# Altium PCB SD-WC.PcbDoc
Units mil, origin at the board's own origin, x right, y up, seen from the top; angles counter-clockwise.
Board outline 3070.87 x 2047.24 mil, 2 copper layers (Top Layer, Top, Bottom Layer, Bottom); 51 components, 45 nets, 219 pads, 28 vias.
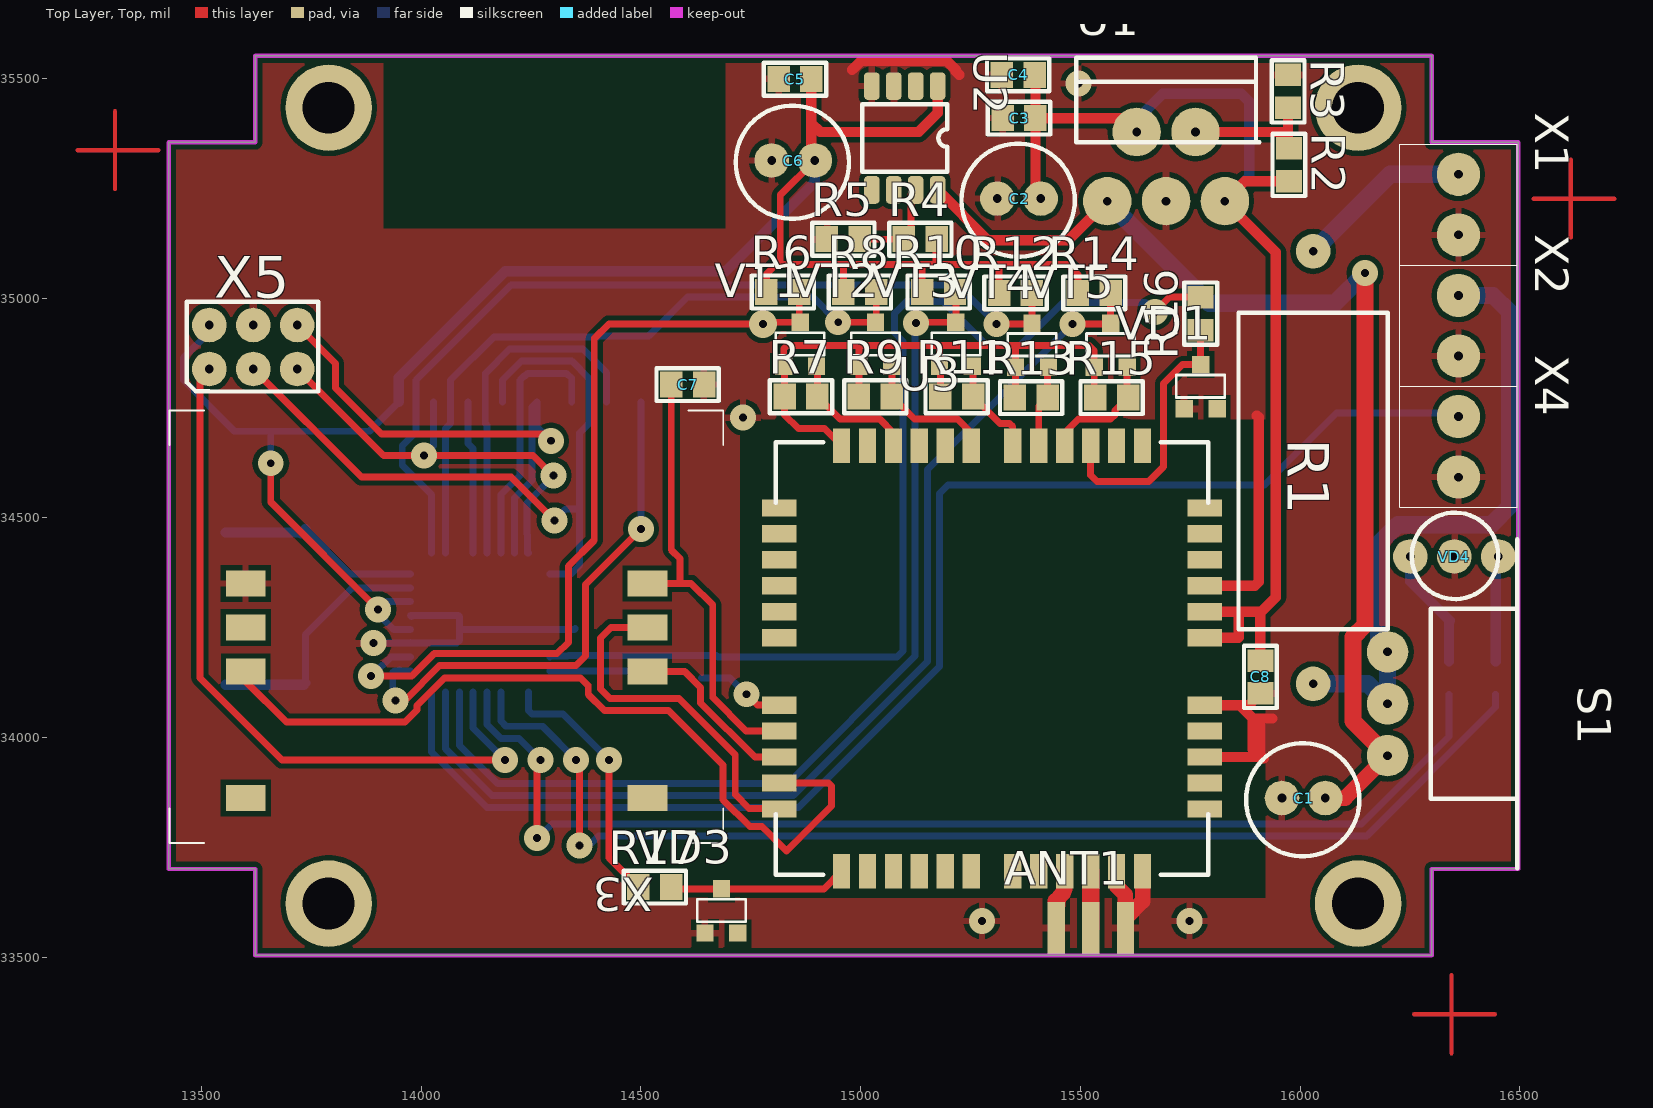
[diagram p0: Top Layer, Top view]
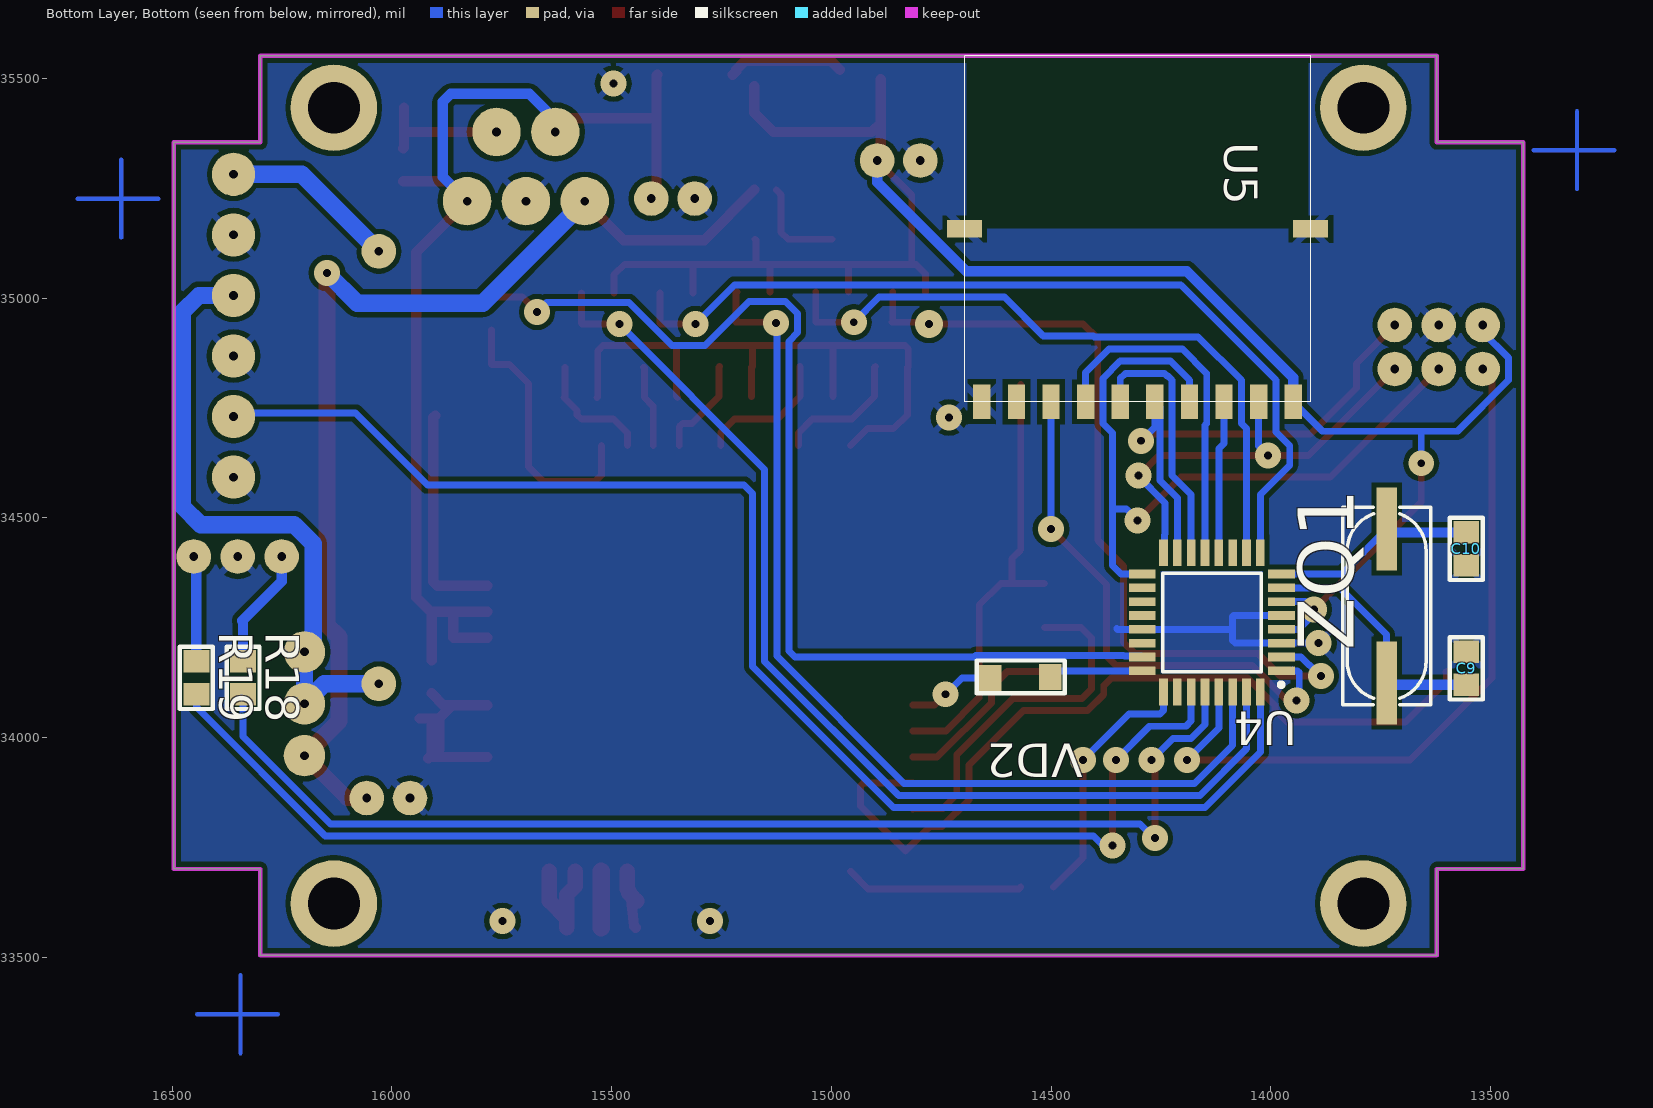
[diagram p1: Bottom Layer, Bottom view, seen from below]

## Layer stack, top to bottom
Top Layer, Top: signal copper 1.4
Dielectric: dielectric 12.6, FR-4, Dk 4.8
Bottom Layer, Bottom: signal copper 1.4

## Board outline
13622.05,33503.94 16299.21,33503.94 16299.21,33700.79 16496.06,33700.79 16496.06,35354.33 16299.21,35354.33 16299.21,35551.18 13622.05,35551.18 13622.05,35354.33 13425.2,35354.33 13425.2,33700.79 13622.05,33700.79

## Design rules (kind name [scope] priority, off if disabled: settings)
Clearance "Clearance_Top Layer, Top_PadToPad" [ExistsOnLayer('Top Layer, Top') And IsPad vs ExistsOnLayer('Top Layer, Top') And IsPad] p1: gap=11.81
Clearance "Clearance_Top Layer, Top_PadToLine" [ExistsOnLayer('Top Layer, Top') And IsPad vs ExistsOnLayer('Top Layer, Top') And IsWire] p2: gap=11.81
Clearance "Clearance_Top Layer, Top_LineToLine" [ExistsOnLayer('Top Layer, Top') And IsWire vs ExistsOnLayer('Top Layer, Top') And IsWire] p3: gap=11.81
Clearance "Clearance_Top Layer, Top_ViaToPad" [ExistsOnLayer('Top Layer, Top') And IsVia vs ExistsOnLayer('Top Layer, Top') And IsPad] p4: gap=11.81
Clearance "Clearance_Top Layer, Top_ViaToLine" [ExistsOnLayer('Top Layer, Top') And IsVia vs ExistsOnLayer('Top Layer, Top') And IsWire] p5: gap=11.81
Clearance "Clearance_Top Layer, Top_ViaToVia" [ExistsOnLayer('Top Layer, Top') And IsVia vs ExistsOnLayer('Top Layer, Top') And IsVia] p6: gap=11.81
Clearance "Clearance_Bottom Layer, Bottom_PadToPad" [ExistsOnLayer('Bottom Layer, Bottom') And IsPad vs ExistsOnLayer('Bottom Layer, Bottom') And IsPad] p7: gap=11.81
Clearance "Clearance_Bottom Layer, Bottom_PadToLine" [ExistsOnLayer('Bottom Layer, Bottom') And IsPad vs ExistsOnLayer('Bottom Layer, Bottom') And IsWire] p8: gap=11.81
Clearance "Clearance_Bottom Layer, Bottom_LineToLine" [ExistsOnLayer('Bottom Layer, Bottom') And IsWire vs ExistsOnLayer('Bottom Layer, Bottom') And IsWire] p9: gap=11.81
Clearance "Clearance_Bottom Layer, Bottom_ViaToPad" [ExistsOnLayer('Bottom Layer, Bottom') And IsVia vs ExistsOnLayer('Bottom Layer, Bottom') And IsPad] p10: gap=11.81
Clearance "Clearance_Bottom Layer, Bottom_ViaToLine" [ExistsOnLayer('Bottom Layer, Bottom') And IsVia vs ExistsOnLayer('Bottom Layer, Bottom') And IsWire] p11: gap=11.81
Clearance "Clearance_Bottom Layer, Bottom_ViaToVia" [ExistsOnLayer('Bottom Layer, Bottom') And IsVia vs ExistsOnLayer('Bottom Layer, Bottom') And IsVia] p12: gap=11.81
Clearance Clearance_Design_HoleToHole [(IsVia Or IsThruPin) vs (IsVia Or IsThruPin)] p13: gap=13
Clearance [All] p14: gap=11.81
PlaneClearance [All] p1: clearance=10
PolygonConnect PolygonConnect_4 [IsPolygon And InNet('GND') And OnLayer('Bottom Layer, Bottom') vs IsVia] p1: connectstyle=Relief reliefconductorwidth=15 reliefentries=4 polygonreliefangle="45 Angle"
PolygonConnect PolygonConnect_3 [IsPolygon And InNet('GND') And OnLayer('Bottom Layer, Bottom') vs IsPad] p2: connectstyle=Relief reliefconductorwidth=15 reliefentries=4 polygonreliefangle="45 Angle"
PolygonConnect PolygonConnect_2 [IsPolygon And InNet('GND') And OnLayer('Top Layer, Top') vs IsVia] p3: connectstyle=Relief reliefconductorwidth=15 reliefentries=4 polygonreliefangle="90 Angle"
PolygonConnect PolygonConnect_1 [IsPolygon And InNet('GND') And OnLayer('Top Layer, Top') vs IsPad] p4: connectstyle=Relief reliefconductorwidth=15 reliefentries=4 polygonreliefangle="90 Angle"
PolygonConnect [All] p5: connectstyle=Relief reliefconductorwidth=10 reliefentries=4 polygonreliefangle="90 Angle"
RoutingVias [All] p1: holewidth=28 width=50 viastyle="Through Hole" minholewidth=28 minwidth=50 maxholewidth=28 maxwidth=50
SilkscreenOverComponentPads [All] p1: minsilkscreentomaskgap=10
SolderMaskExpansion [All] p1: expansion=4
Width [All] p1: maxlimit=10 minlimit=10 preferedwidth=10
26 further rules are at their usual default settings.

## Components (designator, comment, footprint, x,y, rotation, side; value= is the part's Value field where it differs from the comment)
ANT1 "" ANT-CAB 15523.62,33566.93 r0 top
C1 "100 uF" KONDENS-E6.5_KONDENS-E6.5MM(Primary) 15958.66,33862.2 r0 top
C2 "100 uF" KONDENS-E6.5_KONDENS-E6.5MM(Primary) 15311.02,35226.38 r0 top
C3 "22 pF" C0805 15360.24,35409.45 r180 top
C4 "56pF" C0805 15358.27,35507.87 r180 top
C5 "0.1uF" C0805 14850.39,35498.03 r180 top
C6 "100uF" KONDENS-E6.5_KONDENS-E6.5MM(Primary) 14797.24,35312.99 r0 top
C7 "0.1uF" C0805 14606.3,34803.15 r0 top
C8 "0.1uF" C0805 15909.45,34137.8 r270 top
C9 "22 pF" C0805 13555.12,34157.48 r270 bottom
C10 "22 pF" C0805 13555.12,34429.13 r90 bottom
R1 "15R" R2W 16029.53,35106.3 r270 top
R2 "500R" RR0805 15974.41,35303.15 r270 top
R3 "1K" RR0805 15972.44,35470.47 r270 top
R4 "170K" RR0805 15135.83,35133.86 r0 top
R5 "100K" RR0805 14960.63,35133.86 r0 top
R6 "10K" RR0805 14822.83,35013.78 r0 top
R7 "10K" RR0805 14864.17,34775.59 r0 top
R8 "10K" RR0805 14998.03,35013.78 r0 top
R9 "10K" RR0805 15033.46,34775.59 r0 top
R10 "10K" RR0805 15177.17,35013.78 r0 top
R11 "10K" RR0805 15218.5,34775.59 r0 top
R12 "10K" RR0805 15352.36,35011.81 r0 top
R13 "10K" RR0805 15387.8,34773.62 r0 top
R14 "10K" RR0805 15531.5,35011.81 r0 top
R15 "10K" RR0805 15570.87,34773.62 r0 top
R16 "200R" RR0805 15773.62,34964.57 r90 top
R17 "200R" RR0805 14531.5,33659.45 r0 top
R18 "200R" RR0805 16338.58,34135.83 r270 bottom
R19 "200R" RR0805 16444.88,34135.83 r270 bottom
S1 "" "PD 9-1" 16198.82,34076.77 r270 top
U1 "" L200CV 15561.02,35220.47 r0 top
U2 "" SOIC-8 15175.2,35482.28 r270 top
U3 "" WISMO 14812.99,34521.65 r0 top
U4 "" 32A_ATMEGA8L-8AI(Primary) 14133.86,34261.81 r0 bottom
U5 "" TR24A 13948.82,34763.78 r270 bottom
VD1 "" SOT23 15736.22,34748.03 r0 top
VD2 "" "MINI MELF" 14570.87,34135.83 r0 bottom
VD3 "" SOT23 14645.67,33555.12 r0 top
VD4 "" LIGHTDIODE2 16352.36,34413.39 r0 top
VT1 "" SOT23 14824.8,34844.49 r0 top
VT2 "" SOT23 14996.06,34844.49 r0 top
VT3 "" SOT23 15179.13,34844.49 r0 top
VT4 "" SOT23 15352.36,34842.52 r0 top
VT5 "" SOT23 15531.5,34842.52 r0 top
X1 "" DG350-3.5-2P 16360.24,35281.5 r270 top
X2 "" DG350-3.5-2P 16360.24,35005.91 r270 top
X3 "" MOLEX91228-0001 14529.53,34350.39 r180 top
X4 "" DG350-3.5-2P 16360.24,34730.32 r270 top
X5 "" WW3-2 13517.72,34838.58 r0 top
ZQ1 "3.6864 MHz" HC-49/S-SMD_邢-99_(SMD)(Primary) 13736.22,34124.02 r90 bottom

## Footprints (in the part's own frame and the unit in brackets; to place one, negate y for a bottom-side part, rotate by r counter-clockwise, add the part's x,y. Pads: shape width x height; smd on the part's side, far side on the other; paste and mask are expansions set on the pad)
32A_ATMEGA8L-8AI(Primary) [mm]
  rect 1.55x0.5 smd: 1(-4.025,2.8) 2(-4.025,2) 3(-4.025,1.2) 4(-4.025,0.4) 5(-4.025,-0.4) 6(-4.025,-1.2) 7(-4.025,-2) 8(-4.025,-2.8) 17(4.025,-2.8) 18(4.025,-2) 19(4.025,-1.2) 20(4.025,-0.4) 21(4.025,0.4) 22(4.025,1.2) 23(4.025,2) 24(4.025,2.8)
  rect 0.5x1.55 smd: 9(-2.8,-4.025) 10(-2,-4.025) 11(-1.2,-4.025) 12(-0.4,-4.025) 13(0.4,-4.025) 14(1.2,-4.025) 15(2,-4.025) 16(2.8,-4.025) 25(2.8,4.025) 26(2,4.025) 27(1.2,4.025) 28(0.4,4.025) 29(-0.4,4.025) 30(-1.2,4.025) 31(-2,4.025) 32(-2.8,4.025)
  silkscreen extent -4.12,-2.85 2.85,3.72
ANT-CAB [mm]
  rect 1x3 smd: 1(0,0) 2(-2,0) 3(2,0)
C0805 [mm]
  rect 1.3x1.5 smd: 1(-0.95,0) 2(0.95,0)
  silkscreen extent -1.8,-0.95 1.8,0.95
DG350-3.5-2P [mm]
  round 2.5 hole 0.5: 1(0,0) 2(3.5,0)
  silkscreen extent -1.75,-3.4 5.25,3.4
HC-49/S-SMD_邢-99_(SMD)(Primary) [mm]
  rect 4.8x1.2 smd: A(0,0) B(8.89,0)
  silkscreen extent -1.27,-2.54 10.16,2.54
KONDENS-E6.5_KONDENS-E6.5MM(Primary) [mm]
  round 2 hole 0.5: 1(2.5,0) 2(0,0)
  silkscreen extent -2.08,-3.37 4.48,3.17
L200CV [mm]
  round 2.8 hole 0.5: 1(0,0) 2(1.7,4) 3(3.4,0) 4(5.1,4) 5(6.8,0)
  silkscreen extent -1.8,3.4 8.8,8.3
LIGHTDIODE2 [mm]
  round 2 hole 0.5: 1(-0.04,-0.04) 2(-2.58,-0.04) 3(2.5,-0.04)
  silkscreen extent -2.5,-2.5 2.5,2.5
"MINI MELF" [mm]
  rect 1.3x1.5 smd: 1(-1.75,-0.04) 2(1.7,0)
  silkscreen extent -2.6,-1 2.5,0.91
MOLEX91228-0001 [mm]
  rect 2.3x1.5 smd: 1(0.38,0) 2(0.38,2.54) 3(0.38,5.08) 4(23.6,0) 5(23.6,2.54) 6(23.6,5.08) 7(23.6,12.4) 8(0.38,12.4)
  silkscreen extent -4,-10 28,15
"PD 9-1" [mm]
  round 2.4 hole 0.5: 1(0,0) 2(-3,0) 3(3,0)
  silkscreen extent -9.5,2.5 9.5,7.5
R2W [mm]
  round 2 hole 0.5: 1(0,0) 2(25,0)
  silkscreen extent 3.56,-4.32 21.84,4.32
RR0805 [mm]
  rect 1.3x1.5 smd: 1(-0.95,0) 2(0.95,0)
  silkscreen extent -1.8,-0.95 1.8,0.95
SOIC-8 [mm]
  rrect50% 1.6x0.9 smd: 1(0,0) 2(0,-1.27) 3(0,-2.54) 4(0,-3.81) 5(6,-3.81) 6(6,-2.54) 7(6,-1.27) 8(6,0)
  silkscreen extent 1.05,-4.36 4.95,0.55
SOT23 [mm]
  rect 1x1 smd: 1(0,0) 2(1.9,0) 3(0.95,2.55)
  silkscreen extent -0.45,0.65 2.35,1.95
TR24A [mm]
  rect 2x1 smd: 1(0,0) 2(0,-2) 3(0,-4) 4(0,-6) 5(0,-8) 6(0,-10) 7(0,-12) 8(0,-14) 9(0,-16) 10(0,-18)
  rect 1x2 smd: 11(-10,-19) 12(-10,1)
  silkscreen extent -20,-19 0,1
WISMO [mm]
  rect 2x1 smd: 1(0.04,0.02) 2(0.04,-1.48) 3(0.04,-2.98) 4(0.04,-4.48) 5(0.04,-5.98) 6(0.04,-7.48) 7(0.04,-11.38) 8(0.04,-12.88) 9(0.04,-14.38) 10(0.04,-15.88) 11(0.04,-17.38) 24(24.64,-17.38) 25(24.64,-15.88) 26(24.64,-14.38) 27(24.64,-12.88) 28(24.64,-11.38) 29(24.64,-7.48) 30(24.64,-5.98) 31(24.64,-4.48) 32(24.64,-2.98) 33(24.64,-1.48) 34(24.64,0.02)
  rect 1x2 smd: 12(3.64,-20.98) 13(5.14,-20.98) 14(6.64,-20.98) 15(8.14,-20.98) 16(9.64,-20.98) 17(11.14,-20.98) 18(13.54,-20.98) 19(15.04,-20.98) 20(16.54,-20.98) 21(18.04,-20.98) 22(19.54,-20.98) 23(21.04,-20.98) 35(21.04,3.62) 36(19.54,3.62) 37(18.04,3.62) 38(16.54,3.62) 39(15.04,3.62) 40(13.54,3.62) 41(11.14,3.62) 42(9.64,3.62) 43(8.14,3.62) 44(6.64,3.62) 45(5.14,3.62) 46(3.64,3.62)
  silkscreen extent -0.16,-21.18 24.84,3.82
WW3-2 [mm]
  round 2 hole 0.5: 1(0,0) 2(0,2.54) 3(2.54,0) 4(2.54,2.54) 5(5.08,0) 6(5.08,2.54)
  silkscreen extent -1.3,-1.3 6.3,3.89

## Part data
ZQ1: "Capacitor"

## Free pads (board coordinates)
  round 196.85 hole 118.11 unplated: 0(13789.37,33622.05) 0(13789.37,35433.07) 0(16131.89,33622.05) 0(16131.89,35433.07)

## Via types
v1: diameter 59.06, hole 18, Top Layer, Top to Bottom Layer, Bottom, 27 vias
v2: diameter 62.99, hole 18, Top Layer, Top to Bottom Layer, Bottom, 1 vias

## Nets (pads, with @x,y where several pads share a name; then routed paths per layer and width w, separated by ;. In a path a pad name is that pad's centre, name@x,y a point inside that pad or via, vN(x,y) a via of type N, cw(c..) or ccw(c..) an arc to the next point about the centre after c; other vN are vias at no path point)
CTS: R8.2 U4.10 VT2.3 | length 1535.8
  Top Layer, Top w15.75: v1(14948.82,34944.88) 14958.66,34944.88 VT2.3 15035.43,34946.85 R8.2
  Bottom Layer, Bottom w15.75: U4.10 14055.12,34702.76 14066.93,34714.57 14066.93,34812.99 14165.35,34911.42 14401.57,34911.42 14403.54,34913.39 14517.72,34913.39 14606.3,35001.97 14891.73,35001.97 v1(14948.82,34944.88)
DTR: R6.2 U4.2 VT1.3 | length 1864.3
  Top Layer, Top w15.75: v1@13891.73,34133.86 v1(13885.83,34139.76) 13978.35,34139.76 14029.53,34190.94 14309.06,34190.94 14334.65,34216.54 14334.65,34389.76 14393.7,34448.82 14393.7,34907.48 14427.17,34940.94 v2(14777.56,34940.94) 14799.21,34944.88 VT1.3 14860.24,34946.85 R6.2
  Bottom Layer, Bottom w15.75: v1(13885.83,34139.76) 13911.42,34165.35 13913.39,34165.35 13931.1,34183.07 U4.2
FIFO_F: U4.13 U5.7 | length 797.5
  Bottom Layer, Bottom w15.75: U4.13 14149.61,34710.63 14145.67,34714.57 14145.67,34828.74 14200.79,34883.86 14368.11,34883.86 14421.26,34830.71 U5.7
GND: ANT1.2 ANT1.3 C1.2 C2.2 C3.2 C4.2 C5.2 C6.2 C7.2 C8.2 C9.1 C10.1 R3.1 R5.1 U1.3 U2.3 U2.4 U3.20 U3.22 U3.23 U3.26 U3.28 U3.31 U4.3 U4.5 U4.21 U5.10 U5.11 U5.12 VD1.1 VD3.1 VD4.1 X1.2 X2.2 X3.4 X4.2 X5.4 | length 2408.1
  Top Layer, Top w23.62: 14980.32,35519.68 15000,35539.37 15196.85,35539.37 15216.54,35519.68 15216.54,35515.75 15224.41,35507.87 ; ANT1.2 15448.82,33570.87 15456.38,33641.42 15460.63,33681.1 U3.20 ; U3.26 15914.57,33955.51 ; U3.28 15862.2,34073.62 ; U3.31 15896.46,34345.28 15905.51,34354.33 15905.51,34728.35 15901.57,34732.28 ; 15897.64,33968.5 15892.52,33973.62 15892.52,34043.31 ; C8.2 15882.68,34073.62 15862.2,34073.62 ; 15917.32,33952.76 15914.57,33955.51 ; 15937.01,34043.31 15909.45,34043.31 ; C1.2 15958.66,33864.17 C1.2@15960.63,33866.14 ; 15862.2,34073.62 15892.52,34043.31 ; 15892.52,34043.31 15909.45,34043.31 ; 15909.45,34043.31 15909.45,33960.63 15914.57,33955.51
  Top Layer, Top w35.43: 15442.91,33627.95 15456.38,33641.42 15460.63,33645.67 15460.63,33651.57 15464.17,33655.12 U3.20 ; U3.22 15582.28,33661.81 15602.36,33641.73 ANT1.3@15602.36,33588.58 ; ANT1.3 ANT1.3@15602.36,33588.58 ; U3.23 15641.34,33627.56 ANT1.3@15602.36,33588.58
  Bottom Layer, Bottom w15.75: v1(13891.73,34214.57) U4.3 ; U4.3@13975.39,34216.54 U4.3 ; U4.5@13977.36,34275.59 U4.5 14084.65,34277.56 14086.61,34275.59 14086.61,34248.03 ; 14350.39,34248.03 14348.43,34246.06 U4.21 14088.58,34246.06 14086.61,34248.03 ; U4.3 14080.71,34214.57 14086.61,34220.47 14086.61,34248.03
  other v1: 15275.59,33582.68 15748.03,33582.68 14732.28,34728.35 15496.06,35488.19
NET00001: C1.1 S1.3 U1.1 U2.8 | length 2505.3
  Top Layer, Top w23.62: U2.8 15289.37,35131.89 15472.44,35131.89 U1.1
  Top Layer, Top w35.43: C1.1 16102.36,33862.2 S1.3
  Top Layer, Top w39.37: v1(16147.64,35057.09) 16147.64,34255.91 16120.08,34228.35 16120.08,34037.4 S1.3
  Bottom Layer, Bottom w39.37: U1.1 15793.31,34988.19 16078.74,34988.19 v1(16147.64,35057.09)
NET00002: R2.1 R3.2 U1.4 | length 304
  Top Layer, Top w23.62: U1.4 15972.44,35377.95 ; R3.2 15972.44,35377.95 ; R2.1 15972.44,35342.52 15972.44,35377.95
NET00003: R4.1 R5.2 U2.7 | length 223.7
  Top Layer, Top w15.75: R5.2 R4.1 15114.17,35149.61 15114.17,35235.04 U2.7
NET00004: C7.1 U3.8 X3.1 | length 1023.4
  Top Layer, Top w15.75: X3.1 14588.58,34350.39 ; C7.1 14568.9,34427.17 14588.58,34407.48 14588.58,34350.39 ; U3.8 14739.37,34014.57 14663.39,34090.55 14663.39,34301.18 14614.17,34350.39 14588.58,34350.39
NET00005: U3.10 X3.6 | length 1871.6
  Top Layer, Top w15.75: X3.6@13601.18,34149.61 X3.6 13600.39,34127.95 13692.91,34035.43 13962.6,34035.43 13990.16,34062.99 13990.16,34072.83 14053.15,34135.83 14362.2,34135.83 14379.92,34118.11 14379.92,34098.43 14417.32,34061.02 14562.99,34061.02 14687.01,33937.01 14687.01,33858.27 14748.03,33797.24 14775.59,33797.24 14830.71,33742.13 14933.07,33844.49 14933.07,33889.76 14926.38,33896.46 U3.10
NET00006: U3.9 X3.3 | length 401.5
  Top Layer, Top w15.75: X3.3 14599.61,34150.39 14635.83,34114.17 14635.83,34078.74 14759.06,33955.51 U3.9
NET00007: U3.11 X3.2 | length 806.3
  Top Layer, Top w15.75: X3.2 14431.5,34250.39 14407.48,34226.38 14407.48,34110.24 14429.13,34088.58 14586.61,34088.58 14714.57,33960.63 14714.57,33870.08 14746.06,33838.58 14813.39,33838.58 U3.11
NET00008: ANT1.1 U3.21 | length 128.9
  Top Layer, Top w39.37: U3.21 15523.23,33567.32 ANT1.1
NET00009: R16.1 U3.37 VD1.3 | length 623.1
  Top Layer, Top w15.75: U3.37 15523.23,34596.85 15537.4,34582.68 15655.51,34582.68 15688.98,34616.14 15688.98,34805.12 15732.28,34848.43 VD1.3 R16.1
NET00010: R7.2 U3.44 VT1.2 | length 305.8
  Top Layer, Top w15.75: VT1.2 14901.57,34842.52 R7.2 14952.76,34724.41 15043.31,34724.41 15074.41,34693.31 U3.44
NET00011: R9.2 U3.41 VT2.2 | length 312.8
  Top Layer, Top w15.75: VT2.2 R9.2 15122.05,34724.41 15220.47,34724.41 15251.57,34693.31 U3.41
NET00012: R11.2 U3.40 VT3.2 | length 231.2
  Top Layer, Top w15.75: VT3.2 15255.91,34842.52 R11.2 15316.93,34714.57 15338.58,34714.57 15346.06,34707.09 U3.40
NET00013: R13.2 U3.39 VT4.2 | length 187.5
  Top Layer, Top w15.75: U3.39 15405.12,34753.54 R13.2 15425.2,34840.55 VT4.2
NET00014: R15.2 U3.38 VT5.2 | length 281.5
  Top Layer, Top w15.75: U3.38 15464.17,34692.52 15496.06,34724.41 15568.9,34724.41 15578.74,34734.25 15578.74,34744.09 R15.2 15606.3,34775.59 VT5.2
NET00015: R7.1 R9.1 R11.1 R13.1 R15.1 U3.46 VT1.1 VT2.1 VT3.1 VT4.1 VT5.1 | length 1484.6
  Top Layer, Top w15.75: U3.46 14917.72,34702.76 14858.27,34702.76 14826.77,34734.25 R7.1 14826.77,34842.52 VT1.1 14824.8,34883.86 14832.68,34891.73 14998.03,34891.73 ; R9.1 VT2.1 14996.06,34889.76 14998.03,34891.73 ; R11.1 15181.1,34842.52 VT3.1 15179.13,34889.76 15181.1,34891.73 ; R13.1 15352.36,34775.59 VT4.1 15352.36,34891.73 ; R15.1 15531.5,34775.59 VT5.1 15531.5,34879.92 15519.68,34891.73 15352.36,34891.73 ; 14998.03,34891.73 15181.1,34891.73 ; 15181.1,34891.73 15352.36,34891.73
NET00020: R1.2 S1.1 S1.2 X2.1 | length 1467.2
  Bottom Layer, Bottom w39.37: R1.2 16153.54,34122.05 S1.1 S1.2 16179.13,34214.57 16179.13,34440.94 16222.44,34484.25 16435.04,34484.25 16476.38,34525.59 16476.38,34968.5 16438.98,35005.91 X2.1
NET00021: R1.1 X1.1 | length 403.3
  Bottom Layer, Bottom w39.37: R1.1 16204.72,35281.5 X1.1
NET00023: U3.7 VD2.2 | length 202.5
  Top Layer, Top w15.75: v1(14740.16,34098.43) 14764.96,34073.62 U3.7
  Bottom Layer, Bottom w15.75: VD2.2 14702.76,34135.83 v1(14740.16,34098.43)
NET00025: R17.2 U3.12 VD3.3 | length 405.7
  Top Layer, Top w15.75: R17.2 14572.83,33655.51 VD3.3 14916.14,33655.51 U3.12
NET00027: C9.2 U4.7 ZQ1.A | length 576.2
  Bottom Layer, Bottom w15.75: ZQ1.A 13736.22,34234.25 13842.52,34340.55 U4.7
  Bottom Layer, Bottom w23.62: C9.2 13732.28,34120.08 ZQ1.A
NET00028: C10.2 U4.8 ZQ1.B | length 479
  Bottom Layer, Bottom w15.75: ZQ1.B 13838.19,34372.05 U4.8
  Bottom Layer, Bottom w23.62: C10.2 13728.74,34466.54 ZQ1.B ZQ1.B@13726.77,34464.57
NET00030: U4.32 X4.1 | length 3131.3
  Bottom Layer, Bottom w15.75: U4.32 14023.62,33966.53 14149.61,33840.55 14858.27,33840.55 15179.13,34161.42 15179.13,34555.12 15198.82,34574.8 15919.29,34574.8 16082.68,34738.19 16352.36,34738.19 X4.1
NET00049: R18.1 VD4.2 | length 276.6
  Bottom Layer, Bottom w23.62: VD4.2 16250.79,34355.51 16340.55,34265.75 16338.58,34263.78 R18.1
NET00050: R19.1 VD4.3 | length 241
  Bottom Layer, Bottom w23.62: R19.1 16444.88,34405.91 VD4.3
NET00051: R18.2 U4.28 | length 2676.4
  Top Layer, Top w15.75: v1(14263.78,33771.65) 14263.78,33940.94 v1(14271.65,33948.82)
  Bottom Layer, Bottom w15.75: U4.28 14149.61,34029.53 14181.1,33998.03 14222.44,33998.03 v1(14271.65,33948.82) ; v1(14263.78,33771.65) 14265.75,33771.65 14297.24,33803.15 16139.76,33803.15 16338.58,34001.97 R18.2
NET00052: R19.2 U4.27 | length 2716.7
  Top Layer, Top w15.75: v1(14352.36,33948.82) 14360.24,33940.94 v1(14360.24,33753.94)
  Bottom Layer, Bottom w15.75: U4.27 14181.1,34037.4 14192.91,34025.59 14275.59,34025.59 v1(14352.36,33948.82) ; v1(14360.24,33753.94) 14381.89,33753.94 14403.54,33775.59 16151.57,33775.59 16444.88,34068.9 R19.2
ON/OFF: R16.2 U4.23 | length 2402.4
  Top Layer, Top w15.75: v1(15669.29,34968.5) 15702.76,35001.97 R16.2
  Bottom Layer, Bottom w15.75: U4.23 14294.29,34185.04 14332.68,34185.04 14334.65,34187.01 14671.26,34187.01 14675.2,34183.07 15082.68,34183.07 15096.46,34196.85 15096.46,34901.57 15076.77,34921.26 15076.77,34964.57 15104.33,34992.13 15187.01,34992.13 15287.4,34891.73 15362.2,34891.73 15460.63,34990.16 15647.64,34990.16 v1(15669.29,34968.5)
PKT_F: U4.1 U5.8 | length 1252.3
  Top Layer, Top w15.75: v1(13940.94,34084.65) 13962.6,34084.65 14041.34,34163.39 14352.36,34163.39 14374.02,34185.04 14374.02,34348.43 v1(14500,34474.41)
  Bottom Layer, Bottom w15.75: v1@13950.79,34094.49 v1(13940.94,34084.65) 13935.04,34090.55 13935.04,34147.64 13938.98,34151.58 U4.1 13952.76,34151.58 U4.1@13950.79,34153.54 ; v1(14500,34474.41) U5.8
READY: U4.24 VD2.1 | length 215.5
  Bottom Layer, Bottom w15.75: U4.24 14487.79,34151.58 VD2.1
RES: U4.29 X5.1 | length 1668.8
  Top Layer, Top w15.75: X5.1 13496.06,34816.93 13496.06,34135.83 13683.07,33948.82 v1(14190.94,33948.82)
  Bottom Layer, Bottom w15.75: U4.29 14118.11,34021.65 v1(14190.94,33948.82)
RESET: R17.1 U4.25 | length 589
  Top Layer, Top w15.75: v1(14427.17,33948.82) 14427.17,33726.38 R17.1
  Bottom Layer, Bottom w15.75: U4.25 14244.09,34061.02 14251.97,34053.15 14322.83,34053.15 v1(14427.17,33948.82)
RESET_TR: U4.12 U5.3 | length 348.4
  Bottom Layer, Bottom w15.75: U5.3 14106.3,34669.29 14118.11,34657.48 U4.12
RTS: R12.2 U4.9 VT4.3 | length 2031.2
  Top Layer, Top w15.75: v1(15309.06,34940.94) 15387.8,34940.94 VT4.3 R12.2
  Bottom Layer, Bottom w15.75: U4.9 14023.62,34553.15 13956.69,34620.08 13956.69,34663.39 13988.19,34694.88 13988.19,34812.99 14204.72,35029.53 15220.47,35029.53 v1(15309.06,34940.94)
RXD: R10.2 U4.30 VT3.3 | length 2234
  Top Layer, Top w15.75: v1(15125.98,34942.91) 15127.95,34944.88 VT3.3 15216.54,35011.81 R10.2
  Bottom Layer, Bottom w15.75: U4.30 14086.61,33982.28 14173.23,33895.67 14834.65,33895.67 15124.02,34185.04 15124.02,34940.94 v1(15125.98,34942.91)
SPI_CLK: U4.17 U5.4 X5.3 | length 1686.4
  Top Layer, Top w15.75: X5.3 13863.78,34592.52 14204.72,34592.52 v1(14303.15,34494.09)
  Bottom Layer, Bottom w15.75: U5.4 14185.04,34812.99 14228.35,34856.3 14342.52,34856.3 14381.89,34816.93 14381.89,34714.57 14360.24,34692.91 14360.24,34519.68 ; U4.17 14340.55,34372.05 14360.24,34391.73 14360.24,34519.68 ; v1(14303.15,34494.09) 14328.74,34519.68 14360.24,34519.68
SPI_MISO: U4.16 U5.2 X5.5 | length 1019
  Top Layer, Top w15.75: X5.5 13914.57,34641.73 v1(14005.91,34641.73) 14253.94,34641.73 14299.21,34596.46 v1(14301.18,34596.46)
  Bottom Layer, Bottom w15.75: v1(14005.91,34641.73) 14027.56,34663.39 U5.2 ; U4.16 14242.13,34420.28 14242.13,34460.63 14240.16,34462.6 14240.16,34533.46 14301.18,34594.49 v1(14301.18,34596.46)
SPI_MOSI: U4.15 U5.5 X5.6 | length 1185.7
  Top Layer, Top w15.75: X5.6 13805.12,34851.18 13805.12,34795.28 13909.45,34690.94 14279.53,34690.94 v1(14295.28,34675.2)
  Bottom Layer, Bottom w15.75: U4.15 14212.6,34545.28 14251.97,34584.65 14251.97,34751.97 U5.5 14263.78,34706.69 v1(14295.28,34675.2)
SPI_SS: U4.14 U5.6 | length 593.3
  Bottom Layer, Bottom w15.75: U4.14 14181.1,34553.15 14224.41,34596.46 14224.41,34812.99 14234.25,34822.83 14236.22,34822.83 14242.13,34828.74 14330.71,34828.74 14342.52,34816.93 U5.6
TXD: R14.2 U4.31 VT5.3 | length 2456.8
  Top Layer, Top w15.75: v1(15482.28,34940.94) 15566.93,34940.94 VT5.3 R14.2
  Bottom Layer, Bottom w15.75: U4.31 14055.12,33974.41 14161.42,33868.11 14846.46,33868.11 15151.57,34173.23 15151.57,34610.24 v1(15482.28,34940.94)
VCC3.3V: C5.1 C6.1 R4.2 R6.1 R8.1 R10.1 R12.1 R14.1 U2.1 U4.4 U4.6 U5.1 X5.2 | length 4529.8
  Top Layer, Top w15.75: v1(13657.48,34624.02) 13657.48,34535.43 v1(13901.57,34291.34) ; R6.1 14785.43,35055.12 14807.09,35076.77 14816.93,35076.77 ; C6.1 14816.93,35234.25 14816.93,35076.77 ; R8.1 14960.63,35074.8 14962.6,35076.77 ; R10.1 15139.76,35076.77 ; R4.2 15171.26,35131.89 15171.26,35076.77 ; R12.1 15314.96,35074.8 15316.93,35076.77 ; R14.1 15494.09,35053.15 15470.47,35076.77 15316.93,35076.77 ; 14816.93,35076.77 14962.6,35076.77 ; 14962.6,35076.77 15139.76,35076.77 ; 15139.76,35076.77 15171.26,35076.77 ; 15171.26,35076.77 15316.93,35076.77
  Top Layer, Top w23.62: C5.1 14887.8,35397.64 ; C6.1 14887.8,35320.87 14887.8,35397.64 ; U2.1 15175.2,35421.26 15131.89,35377.95 14907.48,35377.95 14887.8,35397.64
  Bottom Layer, Bottom w15.75: X5.2 13517.72,34923.23 13458.66,34864.17 13458.66,34812.99 13574.8,34696.85 13657.48,34696.85 ; v1(13657.48,34624.02) 13657.48,34696.85 ; U5.1 13881.89,34696.85 13657.48,34696.85 ; U4.4 13937.01,34246.06 13901.57,34281.5 v1(13901.57,34291.34) 13903.54,34291.34 13921.26,34309.06 U4.6
  Bottom Layer, Bottom w23.62: U5.1 13948.82,34818.9 14190.94,35061.02 14692.91,35061.02 14895.67,35263.78 C6.1
VCC4.2V: C2.1 C3.1 C4.1 C8.1 R2.2 U1.2 U1.5 U3.29 U3.30 | length 2642.5
  Top Layer, Top w23.62: C4.1 15397.64,35505.91 C3.1 ; C2.1 15397.64,35238.19 C3.1 ; U1.2 15596.46,35409.45 C3.1 ; U3.29 15859.06,34227.17 15860.24,34228.35 15860.24,34280.32 15854.33,34286.22 ; U3.30 15854.33,34286.22 ; U1.5@15824.8,35228.35 15828.74,35224.41 U1.5 ; C8.1 15909.45,34283.46 ; R2.2 15874.02,35265.75 U1.5 ; U1.5 15944.88,35104.33 15944.88,34318.9 15909.45,34283.46 ; 15854.33,34286.22 15906.69,34286.22 15909.45,34283.46
  Bottom Layer, Bottom w23.62: U1.2 15627.95,35405.51 15687.01,35464.57 15866.14,35464.57 15883.86,35446.85 15883.86,35275.59 U1.5
pads on no net: U2.2 U2.5 U2.6 U3.1 U3.2 U3.3 U3.4 U3.5 U3.6 U3.13 U3.14 U3.15 U3.16 U3.17 U3.18 U3.19 U3.24 U3.25 U3.27 U3.32 U3.33 U3.34 U3.35 U3.36 U3.42 U3.43 U3.45 U4.11 U4.18 U4.19 U4.20 U4.22 U4.26 U5.9 VD1.2 VD3.2 X3.5 X3.7 X3.8
copper on no net: | length 2161.4
  Top Layer, Top w10: 13218.5,35336.61 13401.57,35336.61 ; 13303.15,35248.03 13303.15,35425.2 ; 16259.84,33370.08 16442.91,33370.08 ; 16344.49,33281.5 16344.49,33458.66 ; 16531.5,35226.38 16714.57,35226.38 ; 16616.14,35137.8 16616.14,35314.96
  Bottom Layer, Bottom w10: 13218.5,35336.61 13401.57,35336.61 ; 13303.15,35248.03 13303.15,35425.2 ; 16259.84,33370.08 16442.91,33370.08 ; 16344.49,33281.5 16344.49,33458.66 ; 16531.5,35226.38 16714.57,35226.38 ; 16616.14,35137.8 16616.14,35314.96

## Polygon pours and split planes (outlines as drawn)
GND on Top Layer, Top "Top Layer, Top-GND" (solid, remove dead copper, pour order 2): 14610.24,33633.86 14610.24,33503.94 15929.13,33503.94 15929.13,33633.86
GND on Top Layer, Top "Top Layer, Top-GND 1" (solid, remove dead copper, pour order 4): 13622.05,35551.18 13622.05,35354.33 13425.2,35354.33 13425.2,33700.79 13622.05,33700.79 13622.05,33503.94 14724.41,33503.94 14724.41,34724.41 15921.26,34724.41 15921.26,33496.06 16299.21,33503.94 16299.21,33700.79 16496.06,33700.79 16496.06,35354.33 16299.21,35354.33 16299.21,35551.18 14692.91,35551.18 14692.91,35157.48 13913.39,35157.48 13913.39,35551.18
GND on Bottom Layer, Bottom "Bottom Layer, Bottom-GND" (solid, remove dead copper, pour order 6): 13622.05,35551.18 13622.05,35354.33 13425.2,35354.33 13425.2,33700.79 13622.05,33700.79 13622.05,33503.94 16299.21,33503.94 16299.21,33700.79 16496.06,33700.79 16496.06,35354.33 16299.21,35354.33 16299.21,35551.18 14692.91,35551.18 14692.91,35157.48 13913.39,35157.48 13913.39,35551.18

## Keep-outs
Keep-Out Layer, Board:
  lines w5: 13425.2,33700.79 13425.2,35354.33 13622.05,35354.33 13622.05,35551.18 16299.21,35551.18 16299.21,35354.33 16496.06,35354.33 16496.06,33700.79 16299.21,33700.79 16299.21,33503.94 13622.05,33503.94 13622.05,33700.79 13425.2,33700.79
  lines w10: 13425.2,33700.79 13425.2,35354.33 13622.05,35354.33 13622.05,35551.18 16299.21,35551.18 16299.21,35354.33 16496.06,35354.33 16496.06,33700.79 16299.21,33700.79 16299.21,33503.94 13622.05,33503.94 13622.05,33700.79 13425.2,33700.79

## Dimensions
16496.06,35354.33 to 16299.21,33700.79 on Keep-Out Layer, Board
13789.37,33622.05 to 13334.64,34043.9 on Keep-Out Layer, Board
16299.21,35354.33 to 16299.21,33700.79 on Keep-Out Layer, Board
0,0 to 0,0 on Keep-Out Layer, Board
0,0 to 0,0 on Keep-Out Layer, Board
13425.2,35354.33 to 16496.06,35354.33 on Keep-Out Layer, Board
13622.05,35551.18 to 16299.21,35354.33 on Keep-Out Layer, Board

## Text inside footprints (layer, text, board x,y; h text height)
X5: Mechanical 1, Top Assy "1" at 13466.47,34794.83 h31.25; Mechanical 1, Top Assy "2" at 13466.47,34904.83 h31.25